# EAGLE board 12hp_IEC_PWR_panel (EAGLE 6.6.0)

Size 27.94 x 20.32 mm. Coordinates in mm from the lower left corner, seen from the top.
Outline: 1.46,0 26.51,0 arc90 27.94,1.43 27.94,19.11 arc90 26.73,20.32 1.24,20.32 arc90 0,19.08 0,1.46 arc90 1.46,0
Copper layers (1*16): Top 0.035mm / dielectric 1.5mm / Bottom 0.035mm
Design rules "PatternAgents_7mil": minimum track width 7mil, minimum drill 14mil, track to track 7mil, track to pad 7mil, pad to pad 7mil, via to via 7mil, smd to smd 7mil, copper to edge 7mil, drill to drill 7mil, minimum pad ring 12mil, minimum via ring 10mil, stop-mask expansion 4mil, vias tented up to drill 25mil, thermal gap 7mil
Holes 3.17 mm at -10.93,28.75 -10.93,-8.43 39.87,28.75 39.87,-8.43
Holes 3.3 mm at -5.51,10.16 34.49,10.16

## Placement (x,y rotation side)
U$48  BY_CC_SA_TEXTTEXT  [BY_CC_SA_TEXT]  5.07,-19.05 0 top  (outside the outline)

## Library data of the parts
U$48 = PatternAgents-Logos

## Text on the board
tDocu: Tom Moxon